# Allegro board 0603design5brd.brd
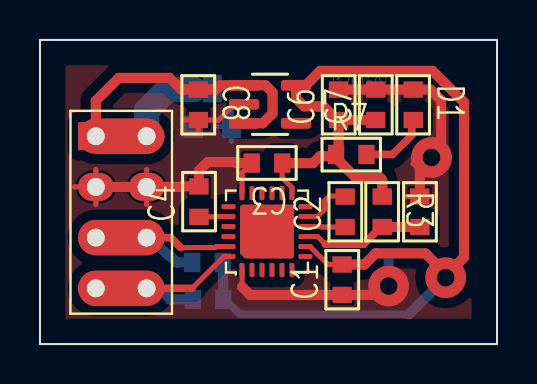
[diagram p0: board, top side]
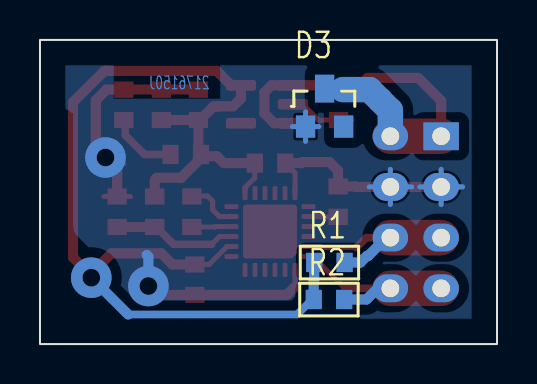
[diagram p1: board, bottom side, seen from below]

Outline 22.86 x 15.24 mm; copper layers: TOP, BOTTOM. Coordinates in mm from the lower left corner of the outline.
Outline path: rectangle 0,0 22.86,15.24

## Design rules (mm)
constraint set DEFAULT: min track width 0.254

## Placement (name value [footprint] x y rotation side)
C1  10nF  [GU-C0603]  15.11 2.46 90 top
C2  0.1nF  [GU-C0603]  15.27 5.87 90 top
C3  0.1uF  [GU-C0603]  12.12 9.07 180 top
C4  2.2nF  [GU-C0603]  7.95 6.38 90 top
C6  0.1uF  [GU-C0603]  14.94 11.23 90 top
C7  2.2uF  [GU-C0603]  16.79 11.23 90 top
C8  2.2uF  [GU-C0603]  7.92 12.75 270 top
D1  LED  [GU-R0603]  18.67 12.75 270 top
D3  DIODE BREAKDOWN  [GU-SOT23]  9.58 10.9 180 bottom
J3  8 HEADER  [GU-HEADER2X4]  2.79 10.41 270 top
R1  4.7K  [GU-R0603]  9.14 4.09 180 bottom
R2  4.7K  [GU-R0603]  9.17 2.24 180 bottom
R3  0  [GU-R0603]  17.12 7.39 270 top
R4  0  [GU-R0603]  19 5.87 90 top
R7  55  [GU-R0603]  14.81 9.5 0 top
U1  MPU 6050  [QFN25P50_400X400X95L35X24T270]  11.35 5.64 0 top
U3  MIC5219  [SOT23-5P95_280X130L35X42M]  11.51 12.01 270 top

## Library data of the parts
C1-C4 C6 = CAPACITOR NON-POL
C7 C8 = C_elect_0
D1 = LED
D3 = DIODE BREAKDOWN_0
J3 = 8 HEADER
R1-R4 R7 = RESISTOR
U1 = MPU 6050_5
U3 = MIC5205

## Footprints (pads in the part's own frame, mm; a bottom-side part is the same pattern mirrored in y, then rotated)
GU-C0603
  rect 0.813x0.965 smd: 1(0,0) 2(1.524,0)
GU-HEADER2X4
  rect 1.397x1.778 hole 0.889: 1(0,0)
  oval 1.397x1.778 hole 0.889: 2(0,2.54) 3(2.54,0) 4(2.54,2.54) 5(5.08,0) 6(5.08,2.54) 7(7.62,0) 8(7.62,2.54)
GU-R0603
  rect 0.813x0.965 smd: 1(0,0) 2(1.524,0)
GU-SOT23
  rect 0.965x1.118 smd: 1(0,0) 2(1.905,0)
  rect 0.965x1.397 smd: 3(0.953,1.905)
QFN25P50_400X400X95L35X24T270
  rrect 0.25x0.7 smd: 1(-1.25,-1.925) 2(-0.75,-1.925) 3(-0.25,-1.925) 4(0.25,-1.925) 5(0.75,-1.925) 6(1.25,-1.925) 13(1.25,1.925) 14(0.75,1.925) 15(0.25,1.925) 16(-0.25,1.925) 17(-0.75,1.925) 18(-1.25,1.925)
  rrect 0.7x0.25 smd: 7(1.925,-1.25) 8(1.925,-0.75) 9(1.925,-0.25) 10(1.925,0.25) 11(1.925,0.75) 12(1.925,1.25) 19(-1.925,1.25) 20(-1.925,0.75) 21(-1.925,0.25) 22(-1.925,-0.25) 23(-1.925,-0.75) 24(-1.925,-1.25)
  custom 2.7x2.7 smd: 25(0,0)
SOT23-5P95_280X130L35X42M
  rect 0.54x1.51 smd: 1(-0.95,-1.3)
  rrect 0.54x1.51 smd: 2(0,-1.3) 3(0.95,-1.3) 4(0.95,1.3) 5(-0.95,1.3)

## Nets
3.3V: C1.2 C3.1 C6.1 C7.1 R1.1 R2.1 R3.1 R7.1 U1.8(VLOGIC) U1.13 U3.5(OUT)
5V: C8.1 D3.3 J3.1 J3.2 U3.1 U3.3
GND: C1.1 C3.2 C4.2 C6.2 C7.2(-) C8.2(-) D1.1(CATHODE) D3.1 J3.3 J3.4 R4.2 U1.1 U1.18 U3.2
AD0: R3.2 R4.1 U1.9
SCL: J3.5 J3.6 R1.2 U1.23
SDA: J3.7 J3.8 R2.2 U1.24
N00291: C2.1 U1.10
N00303: C2.2 U1.11
N00462: C4.1 U1.20
N04164: D1.2 R7.2

Pads without a net: D3 2; U1 2 3 4 5 6 7 12 14 15 16 17 19 21 22 25; U3 4

## Via types
v1: diameter 2.032, hole 0.889, TOP to BOTTOM, 3 vias

## Routing (per net, layer and track width the routed paths; a pad name or vN(x,y) marks a point on that pad's centre or on a via; arc(x,y) is an arc through that point)
3.3V: length 56
  TOP w0.254: U1.8 13.5,4.89 14.4,3.99 C1.2 ; U1.13 12.6,7.84 12.12,8.33 C3.1
  TOP w0.508: 20.55,3.68 21.21,4.34 21.21,12.12 19.64,13.69 14.02,13.69 13.29,12.96 U3.5 12.81,12.31 13.21,11.91 13.92,11.91 13.93,11.9 14.18,11.9 14.86,11.23 C6.1 ; 20.55,3.68 20.55,3.58 v1(20.29,3.33) ; 20.55,3.68 20.14,3.68 19.28,4.55 16.79,4.55 16.23,3.99 C1.2 ; 14.72,9.41 14.01,9.41 13.67,9.07 C3.1 ; 14.72,9.41 R7.1 14.94,9.63 C6.1 ; 14.72,9.41 15.8,8.33 17.02,8.33 17.09,8.26 17.09,8.2 17.12,8.18 R3.1 ; C6.1 C7.1
  BOTTOM w0.381: 18.45,1.48 10,1.48 9.17,2.31
  BOTTOM w0.508: v1(20.29,3.33) 18.45,1.48 ; R2.1 9.17,3.2 9.14,3.23 R1.1
5V: length 21.8
  TOP w0.508: U3.3 11.14,11.06 11.63,11.56 11.63,12.61 11.27,12.97 10.21,12.97 U3.1 9,12.96 8.79,12.75 C8.1 7.06,12.75 6.48,13.34 3.94,13.34 2.79,12.19 J3.1
  TOP w1.778: J3.1 J3.2
  BOTTOM w0.508: 7.71,12.75 7.76,12.8 D3.3
  BOTTOM w1.27: 7.71,12.75 6.38,12.75 5.33,11.71 J3.2
GND: length 52
  TOP w0.254: C8.2 8.66,11.23 ; C8.2 7.92,10.64 ; C8.2 7.26,11.23 ; C3.2 10.1,8.58 U1.18 ; J3.3 2.79,8.75 ; J3.3 1.73,7.87 ; J3.3 2.79,7 ; 5.33,7 J3.4 5.33,8.75 ; 19.66,7.39 R4.2 18.34,7.39 ; 8.79,11.2 8.91,11.2 9.72,12.01 ; 10.1,2.88 U1.1 ; 19.14,9.03 18.66,9.03
  TOP w0.508: C3.2 9.8,9.07 9.75,9.12 8.38,9.12 7.95,8.69 C4.2 7.09,7.9 7.06,7.87 J3.4 J3.3 ; v1(17.44,2.91) 16.99,2.46 C1.1 10.52,2.46 10.1,2.88 ; R4.2 19,8.89 19.46,9.35 v1(19.58,9.35) 20.07,9.83 20.07,12.22 19.53,12.75 D1.1 C7.2 C6.2 ; 9.72,12.01 U3.2
  BOTTOM w0.254: J3.4 5.33,8.75 ; J3.4 6.4,7.87 ; J3.4 4.27,7.87 ; J3.4 5.33,7 ; J3.3 2.79,8.75 ; J3.3 2.79,7 ; J3.3 3.86,7.87 ; J3.3 1.73,7.87 ; 8.91,10.9 D3.1 ; D3.1 9.58,11.63 ; D3.1 10.24,10.9 ; D3.1 9.58,10.16
  BOTTOM w0.508: v1(17.44,2.91) 17.44,4.38 17.53,4.47
AD0: length 6.2
  TOP w0.254: U1.9 13.88,5.39 14.27,5
  TOP w0.381: R3.2 17.04,5.87 16.18,5 14.27,5
  TOP w0.508: R3.2 R4.1
SCL: length 9.7
  TOP w0.254: 7.04,4.84 8.77,4.84 8.82,4.89 U1.23
  TOP w0.381: J3.6 6.54,5.33 7.04,4.84
  TOP w1.778: J3.5 J3.6
  BOTTOM w0.508: J3.6 5.52,5.33 6.44,4.42 6.5,4.42 6.83,4.09 R1.2
SDA: length 9.8
  TOP w0.254: U1.24 9.2,4.39 7.61,2.79
  TOP w0.381: 7.61,2.79 J3.8
  TOP w1.778: J3.7 J3.8
  BOTTOM w0.508: R2.2 6.53,2.24 5.97,2.79 J3.8
N00291: length 2
  TOP w0.254: C2.1 14.1,5.87 14.08,5.89 U1.10
N00303: length 2.7
  TOP w0.254: U1.11 13.88,6.39 14.22,6.73 14.22,7.16 14.48,7.42 15.24,7.42 C2.2
N00462: length 1.5
  TOP w0.254: C4.1 8.81,6.38 8.82,6.39 U1.20
N04164: length 3.5
  TOP w0.381: D1.2 18.59,11.15 18.59,10.46 17.63,9.5 R7.2
  TOP w0.508: D1.2 18.59,11.23

## Copper pours and planes (outline as drawn; the poured copper is in the pictures)
GND on TOP: 1.27,13.97 1.27,1.27 21.59,1.27 21.59,13.97 ; 4 cut-outs
GND on BOTTOM: 1.27,13.97 21.59,13.97 21.59,1.27 1.27,1.27 ; 1 cut-out

## Text on the board
BOTTOM: 2176150J
